# Altium PCB microInv_batt_controller.PcbDoc (part 1 of 2)
Units mil, origin at the board's own origin, x right, y up, seen from the top; angles counter-clockwise.
Board outline 2340 x 3820 mil, 2 copper layers (Top Layer, Bottom Layer), stack 61.8 mil thick; 150 components, 87 nets, 428 pads, 125 vias.
Unrouted connection lines stored in the file: 3.
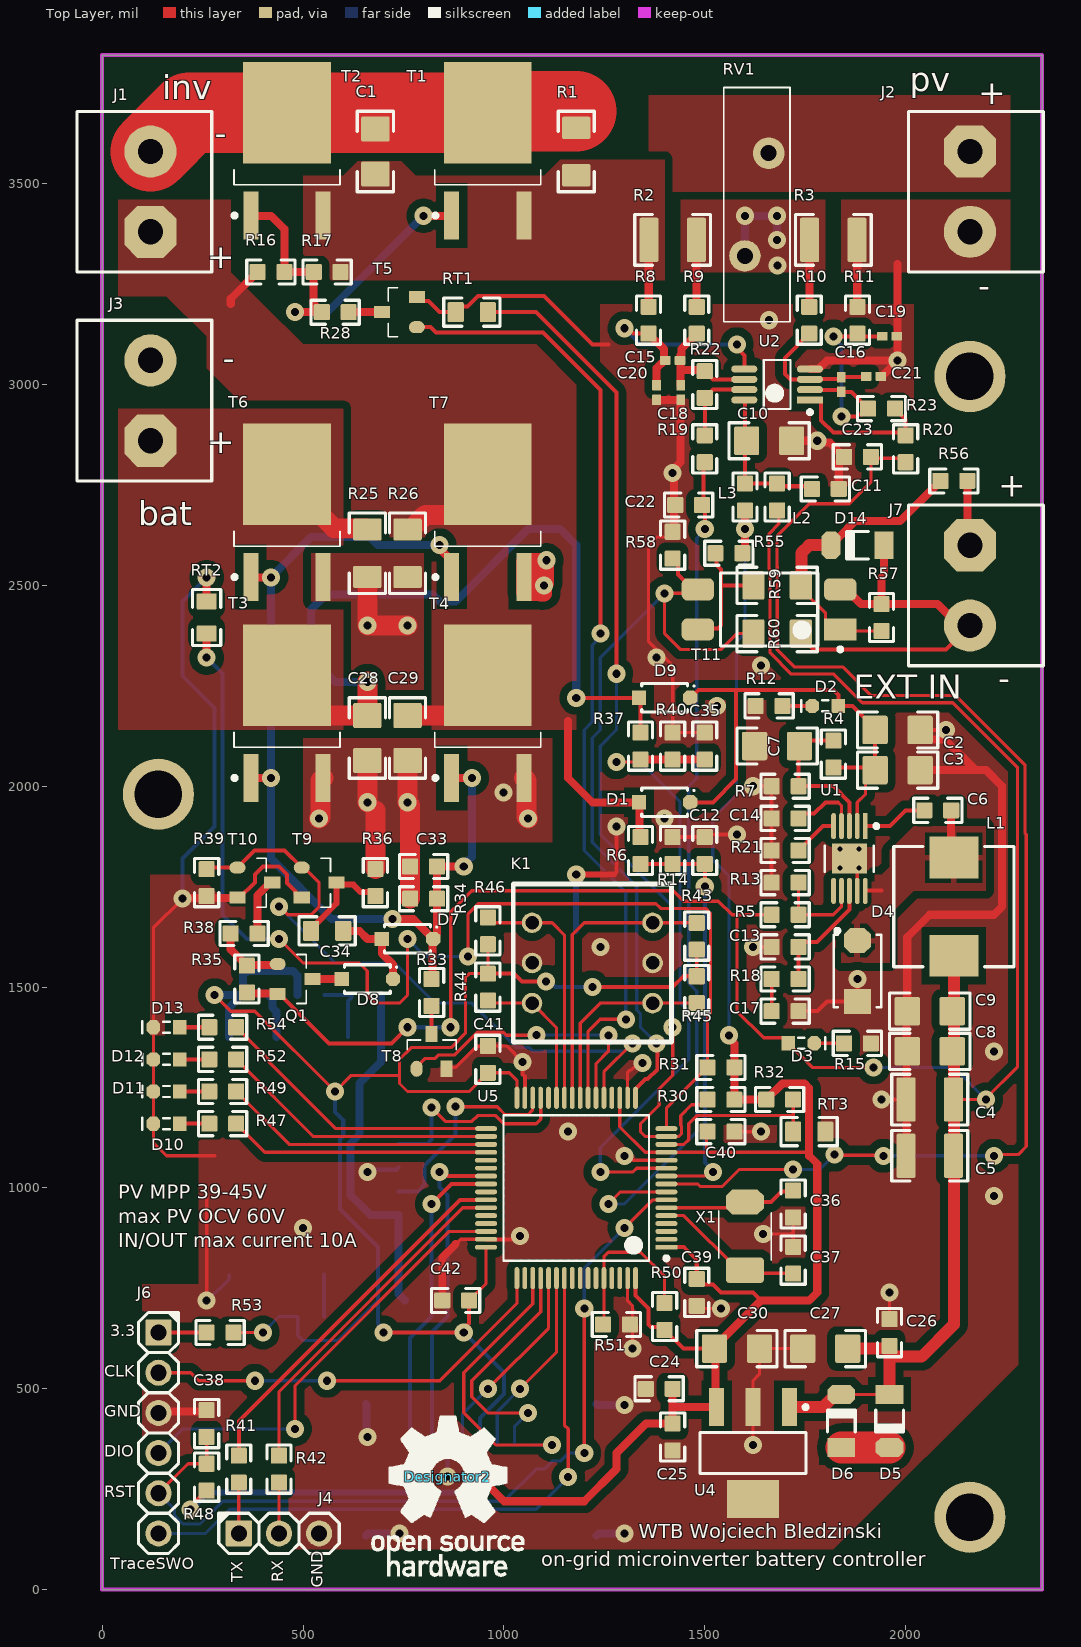
[diagram p0: Top Layer view]
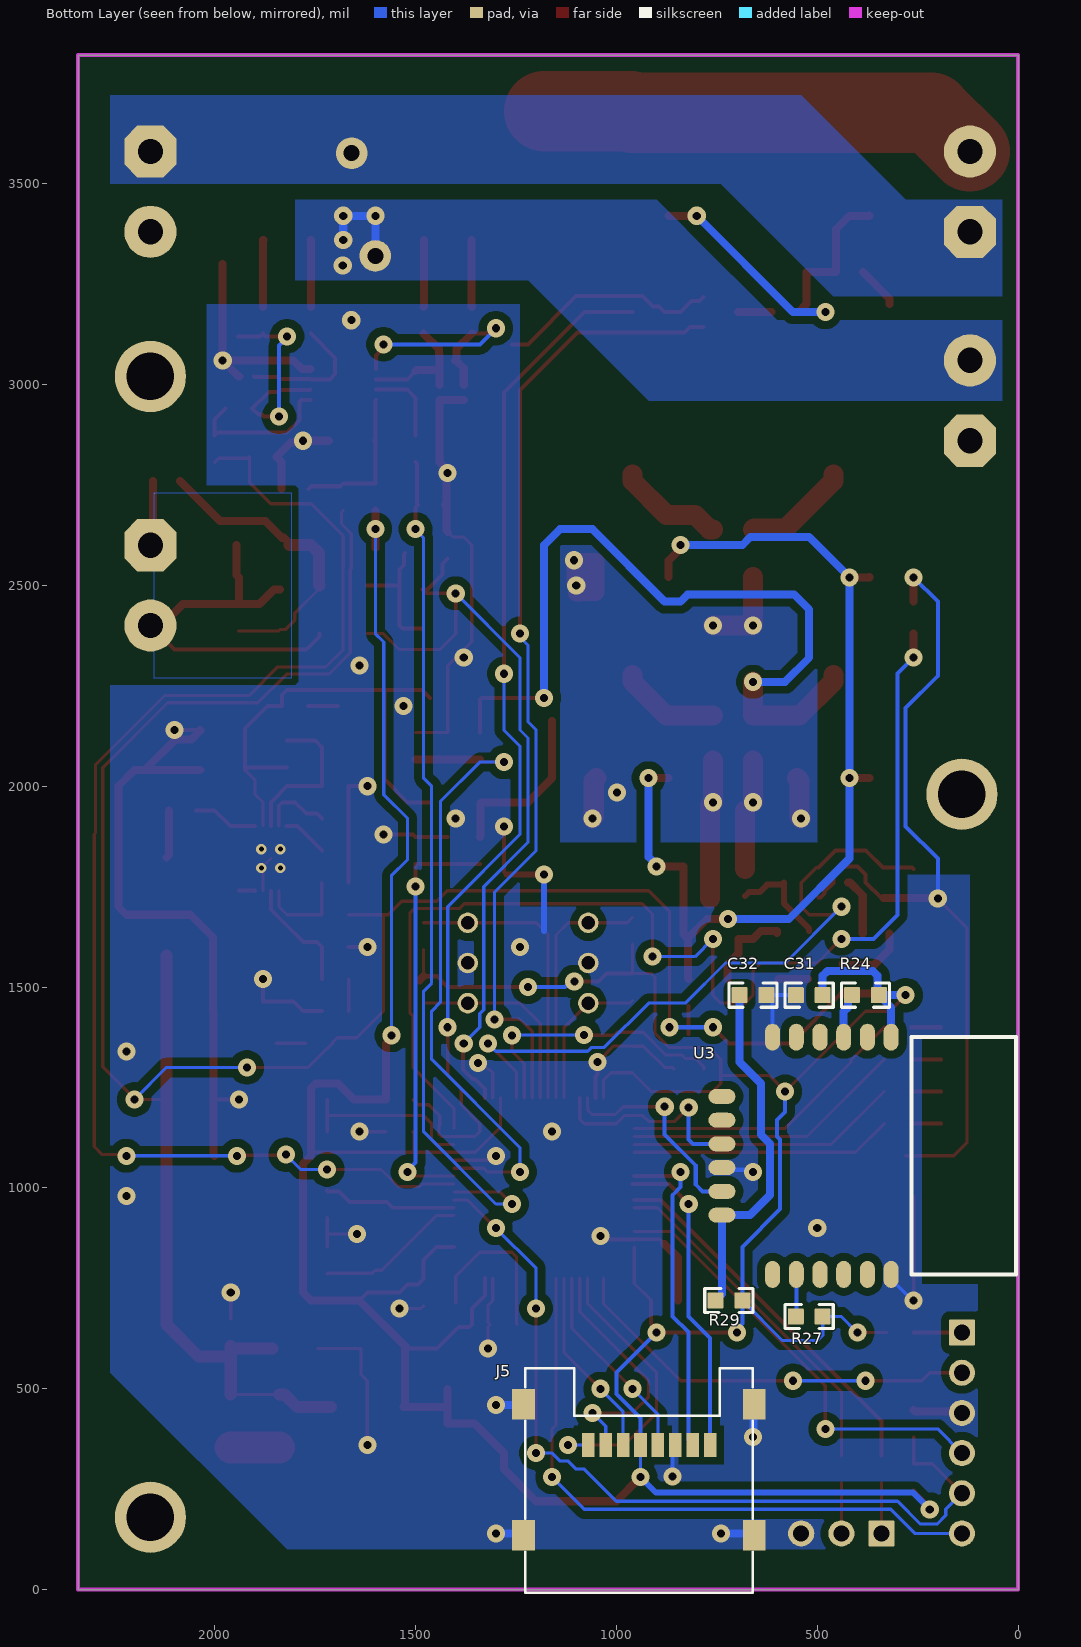
[diagram p1: Bottom Layer view, seen from below]
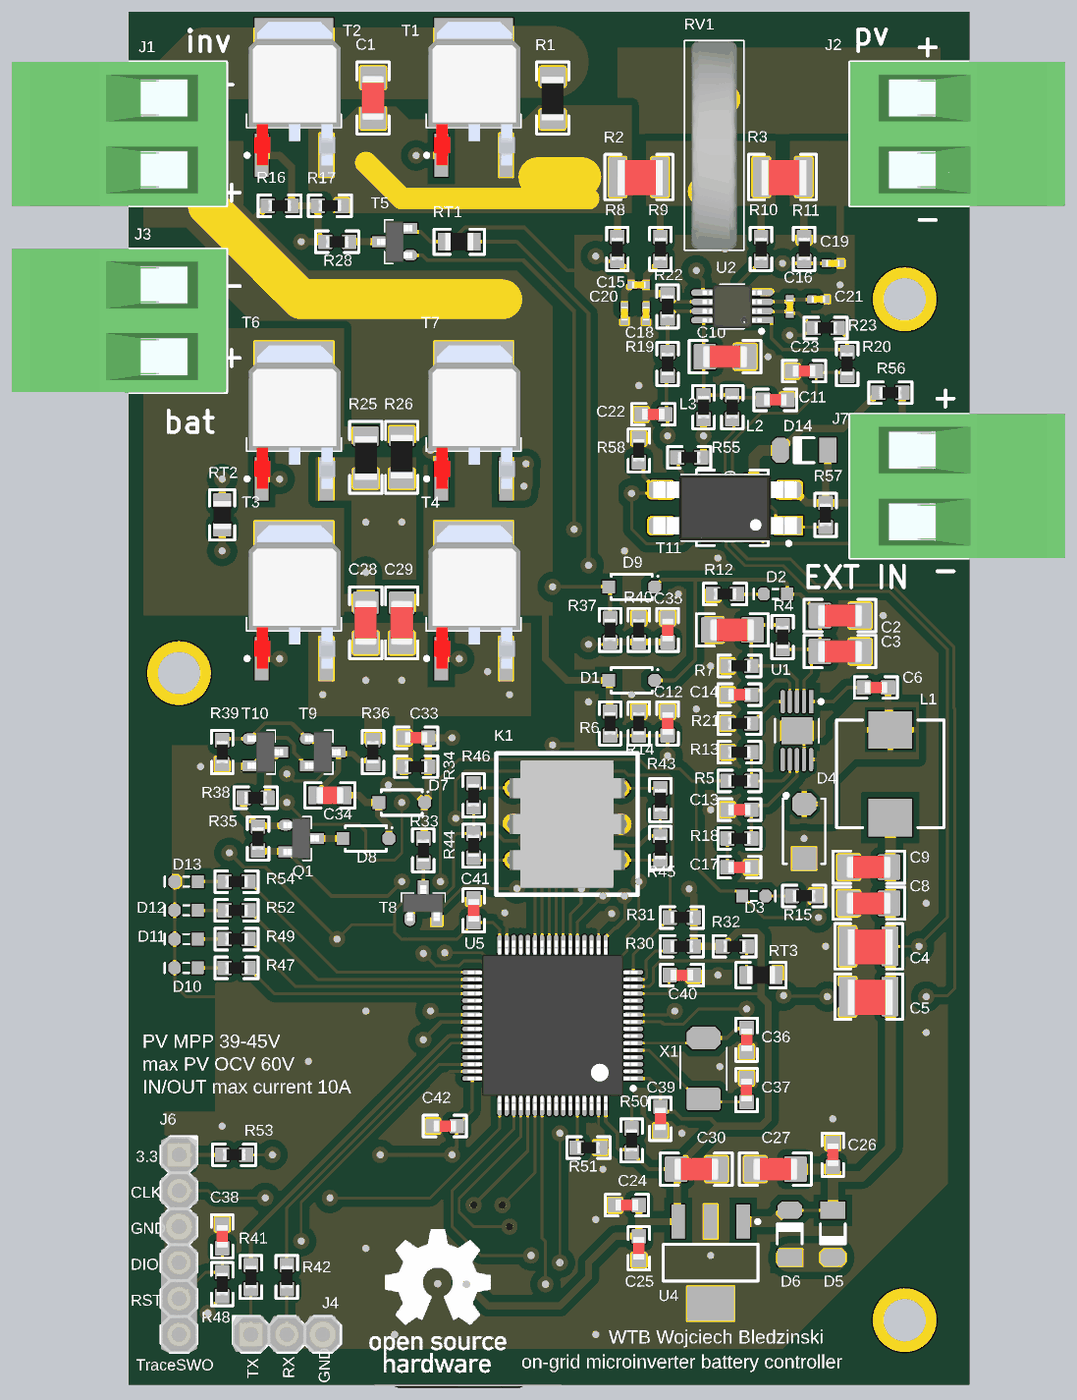
[diagram p3: 3D render of the assembled board from above, using the file's embedded part models]
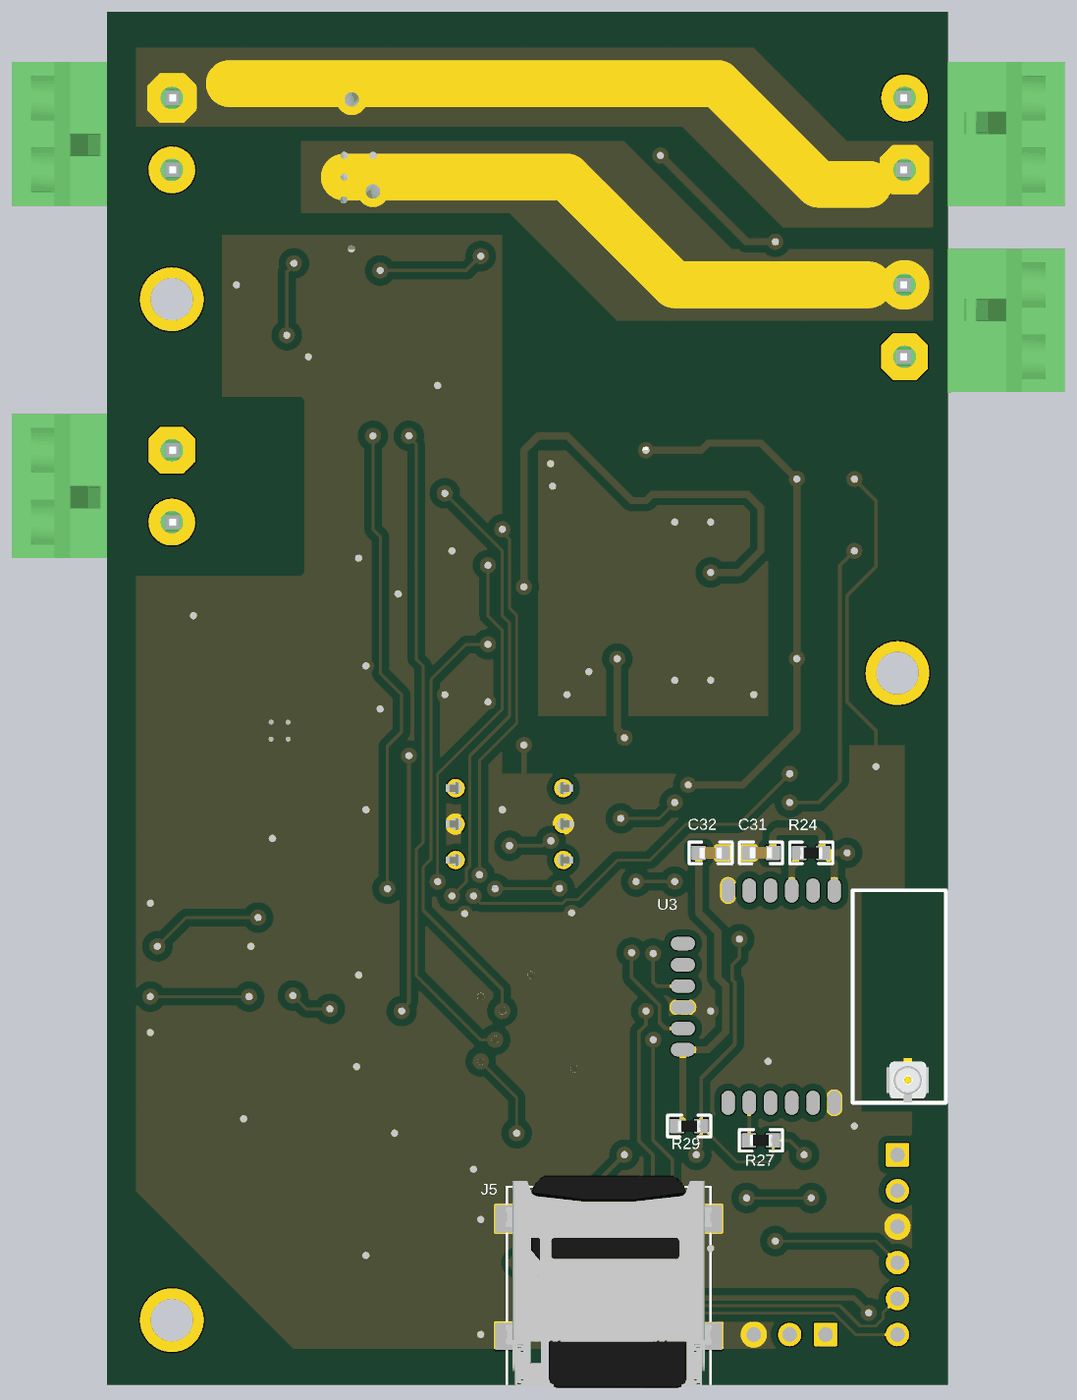
[diagram p4: 3D render of the assembled board from below, using the file's embedded part models]

## Layer stack, top to bottom
Top Solder: solder mask 0.4, Solder Resist, Dk 3.5
Top Layer: signal copper 1.4
Dielectric 1: core 59, Core-043, Dk 4.3
Bottom Layer: signal copper 1.4
Bottom Solder: solder mask 0.4, Solder Resist, Dk 3.5

## Board outline
0,0 0,3820 2340,3820 2340,0

## Design rules (kind name [scope] priority, off if disabled: settings)
Clearance Clearance_400V [InNet('400VDC')] p1: gap=50 ignorepadtopadclearanceinfootprint=FALSE except(0: Arc-Hole Track-Hole SMDPad-Hole THPad-Hole Via-Hole Fill-Hole Poly-Hole Region-Hole Text-Hole)
Clearance [InComponent('U5') or InComponent('U2') or InComponent('U3') or InComponent('U4') or InComponent('u1')] p2: gap=20 ignorepadtopadclearanceinfootprint=FALSE except(0: Arc-Hole Track-Hole SMDPad-Hole THPad-Hole Via-Hole Fill-Hole Poly-Hole Region-Hole Text-Hole; 6: Arc-Arc Arc-Track Arc-SMDPad Track-Track Track-SMDPad SMDPad-SMDPad; 10: Arc-THPad Arc-Via Arc-Text Track-THPad Track-Via Track-Text SMDPad-THPad SMDPad-Via SMDPad-Text THPad-THPad THPad-Via THPad-Text Via-Via Via-Text Text-Text; 15: Fill-Text Poly-Text Region-Text)
Clearance Clearance_1 [All] p3: gap=20 ignorepadtopadclearanceinfootprint=FALSE except(0: Arc-Hole Track-Hole SMDPad-Hole THPad-Hole Via-Hole Fill-Hole Poly-Hole Region-Hole Text-Hole; 10: Arc-Arc Arc-Track Arc-SMDPad Arc-THPad Arc-Via Arc-Text Track-Track Track-SMDPad Track-THPad Track-Via Track-Text SMDPad-SMDPad SMDPad-THPad SMDPad-Via SMDPad-Text THPad-THPad THPad-Via THPad-Text Via-Via Via-Text Text-Text; 15: Fill-Text Poly-Text Region-Text)
FanoutControl Fanout_LCC [IsLCC] p2 off: bgadir=Out bgaviamode=Centered fanoutstyle=Auto fanoutdirection=Alternating viagrid=1 // Fanout_LCC (Default Rule)
PlaneConnect PlaneConnect_1 [InComponentClass('Power') or InNetClass('Power') or IsVia] p1: planeconnectstyle=Direct reliefexpansion=20 reliefentries=4 reliefconductorwidth=10 reliefairgap=10
PlaneConnect [All] p2: planeconnectstyle=Relief reliefexpansion=20 reliefentries=4 reliefconductorwidth=15 reliefairgap=10
PolygonConnect PolygonConnect_1 [All vs InComponentClass('Power') or InNetClass('Power') or IsVia] p1: connectstyle=Direct reliefconductorwidth=10 reliefentries=4 polygonreliefangle="90 Angle" airgapwidth=10
PolygonConnect [All] p2: connectstyle=Relief reliefconductorwidth=15 reliefentries=4 polygonreliefangle="90 Angle" airgapwidth=10
RoutingCorners [All] p1 off: cornerstyle=45-Degree minsetback=100 maxsetback=100
RoutingVias [All] p1: holewidth=20 width=45 viastyle="Through Hole" minholewidth=20 minwidth=45 maxholewidth=20 maxwidth=45
SolderMaskExpansion [All] p1: expansion=4 istentingtop=FALSE
Width [All] p1: maxlimit=200 minlimit=8 preferedwidth=15 minimp=50.000000 maximp=50.000000 favimp=50.000000
27 further rules are at their usual default settings.

## Classes and differential pairs
net class POWER: GND NetC1_1 NetC1_2 NetC28_1 NetC29_2 NetJ3_2 V_SOURCE

## Components (designator, comment, footprint, x,y, rotation, side; value= is the part's Value field where it differs from the comment)
C1 "1u/100" CAP_1206 680,3580 r270 top
C2 "1u/100" CAP_1206 1980,2140 r180 top
C3 "1u/100" CAP_1206 1980,2040 r180 top
C4 "4.7u/25" CAP_1210 2060,1220 r0 top
C5 "4.7u/25" CAP_1210 2060,1080 r0 top
C6 "100n/25" CAP_0603 2080,1940 r0 top
C7 "10u/25" CAP_1206 1680,2100 r180 top
C8 "10u/16" CAP_1206 2060,1340 r180 top
C9 "10u/16" CAP_1206 2060,1440 r180 top
C10 "10u/16" CAP_1206 1660,2860 r0 top
C11 "100n/50" CAP_0603 1800,2740 r180 top
C12 "100n/50" CAP_0603 1500,1840 r90 top
C13 "39p/100" CAP_0603 1700,1600 r180 top
C14 "10n/100" CAP_0603 1700,1920 r180 top
C15 "1n/16" CAP_0402_HD_IPC 1420,3060 r180 top
C16 "1n/16" CAP_0402_HD_IPC 1840,3000 r90 top
C17 "47n/25" CAP_0603 1700,1440 r0 top
C18 "1n/16" CAP_0402_HD_IPC 1440,2980 r270 top
C19 "1n/16" CAP_0402_HD_IPC 1960,3120 r0 top
C20 "1n/16" CAP_0402_HD_IPC 1380,2980 r270 top
C21 "1n/16" CAP_0402_HD_IPC 1920,3020 r0 top
C22 "100n/50" CAP_0603 1460,2700 r180 top
C23 "100n/50" CAP_0603 1880,2820 r180 top
C24 "1u/16" CAP_0603 1386.54,500 r180 top
C25 "1u/16" CAP_0603 1420,380 r270 top
C26 "100n/50" CAP_0603 1960,640 r90 top
C27 "10u/16" CAP_1206 1800,600 r180 top
C28 "1u/100" CAP_1206 660,2120 r270 top
C29 "1u/100" CAP_1206 760,2120 r90 top
C30 "10u/16" CAP_1206 1580,600 r0 top
C31 "1u/16" CAP_0603 520,1480 r0 bottom
C32 "100n/50" CAP_0603 660,1480 r180 bottom
C33 "10n/100" CAP_0603 800,1800 r180 top
C34 "100n/100" CAP_0805 560,1640 r180 top
C35 "100n/50" CAP_0603 1500,2100 r90 top
C36 "220p/100" CAP_0603 1720,960 r90 top
C37 "220p/100" CAP_0603 1720,820 r270 top
C38 "100n/50" CAP_0603 260,413.46 r90 top
C39 "100n/50" CAP_0603 1480,740 r270 top
C40 "100n/50" CAP_0603 1540,1140 r0 top
C41 "100n/50" CAP_0603 960,1320 r90 top
C42 "100n/50" CAP_0603 880,720 r180 top
D1 "Shottky 0.25A/100V BAT46GW" SOD_123 1400,1960 r0 top
D2 "Green LED KP-1608SGC" LED_0603_GREEN 1800,2200 r180 top
D3 "Green LED KP-1608SGC" LED_0603_GREEN 1740,1360 r0 top
D4 "Shottky 2A/20V" SMA_DO-214AC 1880,1540 r90 top
D5 "DNP" D_MINIMELF 1960,420 r270 top
D6 "DNP" D_MINIMELF 1840,420 r90 top
D7 "Shottky 0.25A/100V BAT46GW" SOD_123 760,1620 r0 top
D8 "Shottky 0.25A/100V BAT46GW" SOD_123 660,1520 r0 top
D9 "DNP" SOD_123 1400,2220 r0 top value="Shottky 0.25A/100V BAT46GW"
D10 "Green LED KP-1608SGC" LED_0603_GREEN 160,1160 r180 top
D11 "Green LED KP-1608SGC" LED_0603_GREEN 160,1240 r180 top
D12 "Green LED KP-1608SGC" LED_0603_GREEN 160,1320 r180 top
D13 "Green LED KP-1608SGC" LED_0603_GREEN 160,1400 r180 top
D14 "DNP" D_MINIMELF 1880,2600 r180 top
Designator2 "Comment" PCB_LOGO_OSHW 860,281.5 r0 top
J1 "5.08 TB V" CON_1x2_5.08TB 120,3480 r90 top
J2 "5.08 TB V" CON_1x2_5.08TB 2160,3480 r270 top
J3 "5.08 TB V" CON_1x2_5.08TB 120,2960 r90 top
J4 "1x3p 2.54mm GP" CON_PIN1x3_THT 340,140 r0 top
J5 "Micro SD 112C-TBAR-R02 lub 472192001" 112C_TXAR_R01 943.94,-8.11 r180 bottom
J6 "1x6p 2.54mm" CON_PIN1x6_THT 140,640 r270 top
J7 "5.08 TB V" CON_1x2_5.08TB 2160,2500 r270 top
K1 "HEX/BCD" MECH_SW_HEXBCD 1220,1560 r270 top
L1 "22u 1.09A DLCSS075F-220M" IND_DER0705 2120,1700 r270 top
L2 "DNP" RES_0603 1680,2720 r90 top value="300ohm@100MHz 1A"
L3 "300ohm@100MHz 1A" RES_0603 1600,2720 r90 top
Q1 "BSS84PH6433" SOT23-3 480,1520 r0 top
R1 "dnp" RES_1206 1180,3580 r270 top value="0R 5%"
R2 "2mR 1%" RES_1210 1420,3360 r0 top
R3 "2mR 1%" RES_1210 1820,3360 r0 top
R4 "240k" RES_0603 1820,2080 r270 top
R5 "72k 5%" RES_0603 1700,1680 r180 top
R6 "470k" RES_0603 1340,1840 r90 top
R7 "10k" RES_0603 1700,2000 r0 top
R8 "1k 5%" RES_0603 1360,3160 r90 top
R9 "1k 5%" RES_0603 1480,3160 r90 top
R10 "1k 5%" RES_0603 1760,3160 r90 top
R11 "1k 5%" RES_0603 1880,3160 r90 top
R12 "510 5%" RES_0603 1660,2200 r0 top
R13 "10k 5%" RES_0603 1700,1760 r0 top
R14 "16k 5%" RES_0603 1420,1840 r270 top
R15 "510 5%" RES_0603 1880,1360 r180 top
R16 "100k 5%" RES_0603 420,3280 r0 top
R17 "47k 5%" RES_0603 560,3280 r0 top
R18 "20k 5%" RES_0603 1700,1520 r0 top
R19 "22k 5%" RES_0603 1500,2840 r270 top
R20 "22k 5%" RES_0603 2000,2840 r270 top
R21 "100k 5%" RES_0603 1700,1840 r0 top
R22 "49.9k" RES_0603 1500,3000 r90 top
R23 "49.9k" RES_0603 1940,2940 r180 top
R24 "10k 5%" RES_0603 380,1480 r180 bottom
R25 "4M7 5%" RES_1206 660,2580 r270 top
R26 "4M7 5%" RES_1206 760,2580 r90 top
R27 "10k 5%" RES_0603 520,680 r0 bottom
R28 "330 5%" RES_0603 580,3180 r0 top
R29 "10k 5%" RES_0603 720,720 r0 bottom
R30 "10k 5%" RES_0603 1540,1220 r180 top
R31 "10k 5%" RES_0603 1540,1300 r180 top
R32 "10k 5%" RES_0603 1686.54,1220 r0 top
R33 "10k 5%" RES_0603 820,1486.54 r270 top
R34 "220k" RES_0603 800,1720 r0 top
R35 "10k 5%" RES_0603 360,1520 r90 top
R36 "4k7" RES_0603 680,1760 r270 top
R37 "470k" RES_0603 1340,2100 r90 top
R38 "1k 5%" RES_0603 353.27,1633.27 r180 top
R39 "10k 5%" RES_0603 260,1760 r90 top
R40 "16k 5%" RES_0603 1420,2100 r270 top
R41 "1k 5%" RES_0603 340,300 r90 top
R42 "1k 5%" RES_0603 440,300 r90 top
R43 "10k" RES_0603 1480,1626.54 r90 top
R44 "10k" RES_0603 960,1500 r270 top
R45 "10k" RES_0603 1480,1493.46 r270 top
R46 "10k" RES_0603 960,1640 r90 top
R47 "1k 5%" RES_0603 300,1160 r0 top
R48 "10k 5%" RES_0603 260,280 r90 top
R49 "1k 5%" RES_0603 300,1240 r0 top
R50 "dnp" RES_0603 1400,680 r90 top value="10k 5%"
R51 "10k 5%" RES_0603 1280,660 r180 top
R52 "1k 5%" RES_0603 300,1320 r0 top
R53 "510 5%" RES_0603 293.46,640 r0 top
R54 "1k 5%" RES_0603 300,1400 r0 top
R55 "10k 5%" RES_0603 1560,2580 r180 top
R56 "10k" RES_0603 2120,2760 r180 top
R57 "10k" RES_0603 1940,2420 r90 top
R58 "10k 5%" RES_0603 1420,2600 r90 top
R59 "DNP" RES_1206 1680,2500 r0 top value="0R 5%"
R60 "DNP" RES_1206 1680,2380 r0 top value="0R 5%"
RT1 "10k B=3900K NCP21XV103J03RA" RES_0805 920,3180 r180 top value="10k B=3900K NCP21XV103J03RA"
RT2 "10k B=3900K NCP21XV103J03RA" RES_0805 260,2420 r90 top value="10k B=3900K NCP21XV103J03RA"
RT3 "10k B=3900K NCP21XV103J03RA" RES_0805 1760,1140 r0 top value="10k B=3900K NCP21XV103J03RA"
RV1 "50VAC 1kA" RES_VAR_S14 1629.53,3447.95 r90 top
T1 "IPD034N06N3GATMA1" DPAK_369C_issueD 960,3580 r90 top
T2 "IPD034N06N3GATMA1" DPAK_369C_issueD 460,3580 r90 top
T3 "IPD034N06N3GATMA1" DPAK_369C_issueD 460,2180 r90 top
T4 "IPD034N06N3GATMA1" DPAK_369C_issueD 960,2180 r90 top
T5 "N mosfet BSS138" SOT23-3 740,3180 r180 top
T6 "IPD034N06N3GATMA1" DPAK_369C_issueD 460,2680 r90 top
T7 "IPD034N06N3GATMA1" DPAK_369C_issueD 960,2680 r90 top
T8 "N mosfet BSS138" SOT23-3 820,1340 r90 top
T9 "N mosfet BSS138" SOT23-3 540,1760 r0 top
T10 "N mosfet BSS138" SOT23-3 380,1760 r0 top
T11 "HCPL817-300E" HCPL-817 1660,2440 r180 top
U1 "TPS57160QDGQRQ1" MSOP10_DQG_S_PDSO_G10 1860,1820 r270 top
U2 "LMV772QMM/NOPB" MSOP8_3x3_846AD-01 1680,3000 r180 top
U3 "WT8266-S2" MOD_WT8266-S2 371.14,1080 r270 bottom
U4 "MCP1825S-3302ED" sot223 1620,340 r270 top
U5 "IC_STM32L431RCT6_LQFP64" LQFP64_10x10 1180,1000 r180 top
X1 "OSCX_8M_5,0x3,2" X_5.0X3.2 1600,880 r270 top

## Footprints (in the part's own frame and the unit in brackets; to place one, negate y for a bottom-side part, rotate by r counter-clockwise, add the part's x,y. Pads: shape width x height; smd on the part's side, far side on the other; paste and mask are expansions set on the pad)
112C_TXAR_R01 [mm] "Micor SD Connector, 3D MOLEX 472192001; ATTEND 112C-TBAR-R02"
  rect 0.8x1.5 smd: 1(-3.2,9.35) 2(-2.1,9.35) 3(-1,9.35) 4(0.1,9.35) 5(1.2,9.35) 6(2.3,9.35) 7(3.4,9.35) 8(4.5,9.35)
  rect 1.448x1.93 smd: 6(-7.29,3.632) 6(-7.29,11.938) 6(7.29,3.632) 6(7.29,11.938)
  silkscreen extent -7.2,0 7.2,14.2, body extent -7.3,0 7.3,15, height 2.1
CAP_0402_HD_IPC [mm]
  rrect10% 0.67x0.55 smd: 1(-0.465,0) 2(0.465,0)
  body extent -0.5,-0.25 0.5,0.25, height 0.56
CAP_0603 [mil]
  rrect15% 40x40 smd: 1(-33.46,0) 2(33.46,0)
  silkscreen extent -60,-30 60,30, body extent -31,-16 31,15, height 12
CAP_0805 [mil]
  rrect15% 40x50 smd: 1(-40,0) 2(40,0)
  silkscreen extent -70,-35 70,35, body extent -39,-25 39,25, height 31
CAP_1206 [mil] "1206 (3216 metric)"
  rrect15% 63x71 smd: 1(-56,0) 2(56,0)
  silkscreen extent -100,-45 100,45, body extent -63,-31 63,31, height 39
CAP_1210 [mm] "1210"
  rrect15% 1.2x2.8 smd: 1(-1.5,0) 2(1.5,0)
  silkscreen extent -2.4,-1.6 2.4,1.6, body extent -1.5,-1.3 1.7,1.2, height 0.92
CON_1x2_5.08TB [mm] "5,08mm - PCB Headers - vertical - Opened ends - 02p, 3D WE 691311500002, MLX , NINIGI TBG-5-PB-2P/GN, plug 691351500002 (rev1)"
  oct 3.3x3.3 hole 1.6: 1(-2.54,0)
  round 3.3 hole 1.6: 2(2.54,0)
  silkscreen extent -5.08,-3.87 5.08,4.64, body extent -5.08,-3.86 5.08,11.3, height 22.05
CON_PIN1x3_THT [mil]
  rrect10% 65x65 hole 40: 1(0,0)
  round 65 hole 40: 2(100,0) 3(200,0)
  silkscreen extent -50,-50 250,50, body extent -52,-49 248,51, height 371
CON_PIN1x6_THT [mil]
  rrect10% 65x65 hole 40: 1(0,0)
  round 65 hole 40: 2(100,0) 3(200,0) 4(300,0) 5(400,0) 6(500,0)
  silkscreen extent -50,-50 550,50, body extent -50,-50 550,50, height 371
D_MINIMELF [mm] "SOD-80"
  rect 1.2x1.75 smd: 1(-1.675,0)
  oct 1.2x1.75 smd: 2(1.675,0)
  silkscreen extent -0.7,-0.87 0.7,0.88, body extent -1.85,-0.8 1.85,0.8, height 1.6
DPAK_369C_issueD [mm] "D-PAK 369C_issueD, TO252AA, Body 6,2x6,7mm (max), IPC MD"
  rect 3.05x0.95 smd: 1(-4.05,2.29) 3(-4.05,-2.29)
  rect 6.4x5.55 smd: 4(2.45,0)
  silkscreen extent -4.17,-3.35 -1.15,3.44, body extent -4.77,-3.3 5.37,3.2, height 2.43
HCPL-817 [mm] "SOP, 4-Leads, Body 4.60x6.50mm, Pitch 2.54mm, IPC Medium Density"
  rect 2.05x1.4 smd paste-0.127: 1(-4.5,1.27)
  rrect50% 2.05x1.4 smd paste-0.127: 2(-4.5,-1.27) 3(4.5,-1.27) 4(4.5,1.27)
  silkscreen extent -4.63,-2.3 3.07,2.64, body extent -5.08,-2.3 5.08,2.3, height 3.5
IND_DER0705 [mm] "DER0705 Ferrocore; Precision Wire Wound Inductor, 2-Leads, Body 7,6x7,6mm, IPC Medium Density"
  rect 2.65x3.1 smd: 1(-3.1,0) 2(3.1,0)
  silkscreen extent -3.8,-3.8 3.8,3.8, body extent -3.8,-3.8 3.8,3.8, height 4.9
LED_0603_GREEN [mm] "LED 0603 GREEN"
  rect 0.85x0.9 smd: 1(-0.825,0)
  oct 0.85x0.9 smd: 2(0.825,0)
  silkscreen extent -0.2,-0.38 1.53,0.37, body extent -0.85,-0.45 0.85,0.45, height 1.1
LQFP64_10x10 [mm] "TSQFP, 64-Leads, Body 10.00x10.00mm, Pitch 0.50mm, IPC MD,  LQFP64 - 64-pin, 10 x 10 mm low-profile quad flat package outline"
  rect 1.4x0.3 smd: 1(-5.7,3.75)
  oval 1.4x0.3 smd: 2(-5.7,3.25) 3(-5.7,2.75) 4(-5.7,2.25) 5(-5.7,1.75) 6(-5.7,1.25) 7(-5.7,0.75) 8(-5.7,0.25) 9(-5.7,-0.25) 10(-5.7,-0.75) 11(-5.7,-1.25) 12(-5.7,-1.75) 13(-5.7,-2.25) 14(-5.7,-2.75) 15(-5.7,-3.25) 16(-5.7,-3.75) 33(5.7,-3.75) 34(5.7,-3.25) 35(5.7,-2.75) 36(5.7,-2.25) 37(5.7,-1.75) 38(5.7,-1.25) 39(5.7,-0.75) 40(5.7,-0.25) 41(5.7,0.25) 42(5.7,0.75) 43(5.7,1.25) 44(5.7,1.75) 45(5.7,2.25) 46(5.7,2.75) 47(5.7,3.25) 48(5.7,3.75)
  oval 0.3x1.4 smd: 17(-3.75,-5.7) 18(-3.25,-5.7) 19(-2.75,-5.7) 20(-2.25,-5.7) 21(-1.75,-5.7) 22(-1.25,-5.7) 23(-0.75,-5.7) 24(-0.25,-5.7) 25(0.25,-5.7) 26(0.75,-5.7) 27(1.25,-5.7) 28(1.75,-5.7) 29(2.25,-5.7) 30(2.75,-5.7) 31(3.25,-5.7) 32(3.75,-5.7) 49(3.75,5.7) 50(3.25,5.7) 51(2.75,5.7) 52(2.25,5.7) 53(1.75,5.7) 54(1.25,5.7) 55(0.75,5.7) 56(0.25,5.7) 57(-0.25,5.7) 58(-0.75,5.7) 59(-1.25,5.7) 60(-1.75,5.7) 61(-2.25,5.7) 62(-2.75,5.7) 63(-3.25,5.7) 64(-3.75,5.7)
  silkscreen extent -5.82,-4.6 4.6,4.6, body extent -6,-6 6,6, height 1.6
MECH_SW_HEXBCD [mm] "ERD116RSZ, 3D z omron A6CV-16R"
  round 1.3 hole 0.85: 1(-2.54,3.81) 2(2.54,-3.81) 4(2.54,3.81) 8(-2.54,-3.81) C(0,3.81) C(0,-3.81)
  silkscreen extent -5,-5 5,5, body extent -4.5,-4.5 4.5,4.51, height 4.5
MOD_WT8266-S2 [mm] "WT8266-S2 TENSILICA XIAOE WIFI"
  oval 1.7x0.95 smd: 1(-7.5,1.4) 2(-7.5,-0.1) 3(-7.5,-1.6) 4(-7.5,-3.1) 5(-7.5,-4.6) 6(-7.5,-6.1) 13(7.5,-6.1) 14(7.5,-4.6) 15(7.5,-3.1) 16(7.5,-1.6) 17(7.5,-0.1) 18(7.5,1.4)
  oval 0.95x1.7 smd: 7(-3.75,-9.3) 8(-2.25,-9.3) 9(-0.75,-9.3) 10(0.75,-9.3) 11(2.25,-9.3) 12(3.75,-9.3)
  silkscreen extent -7.5,2.7 7.5,9.3, body extent -7.5,-9.3 7.5,9.3, height 3.05
MSOP8_3x3_846AD-01 [mm] "Analog RM-8 JEDEC MO-187-AA; Body 3,1x3,1mm (max), 0,65mm, IPC MD"
  rect 1.65x0.45 smd: 1(-2.075,0.975)
  oval 1.65x0.45 smd: 2(-2.075,0.325) 3(-2.075,-0.325) 4(-2.075,-0.975) 5(2.075,-0.975) 6(2.075,-0.325) 7(2.075,0.325) 8(2.075,0.975)
  silkscreen extent -2.2,-1.55 0.85,1.87, body extent -2.1,-1.53 2.1,1.52, height 1.3
MSOP10_DQG_S_PDSO_G10 [mm] "PowerPAD MSOP10"
  rect 1.65x0.3 smd: 1(-2.05,1)
  oval 1.65x0.3 smd: 2(-2.05,0.5) 3(-2.05,0) 4(-2.05,-0.5) 5(-2.05,-1) 6(2.05,-1) 7(2.05,-0.5) 8(2.05,0) 9(2.05,0.5) 10(2.05,1)
  rect 1.9x2.2 smd: 11(0,0)
  silkscreen extent -2.17,-1.55 0.82,1.83, body extent -1.55,-1.55 1.55,1.55, height 1.1
PCB_LOGO_OSHW [mil] "open source hardware logo 400px"
  silkscreen extent -190,-248 191,151
RES_0603 [mil]
  rrect15% 40x40 smd: 1(-33.46,0) 2(33.46,0)
  silkscreen extent -60,-30 60,30, body extent -31,-16 31,16, height 18
RES_0805 [mil]
  rrect15% 40x50 smd: 1(-40,0) 2(40,0)
  silkscreen extent -70,-35 70,35, body extent -39,-25 39,25, height 20
RES_1206 [mm]
  rrect15% 1.4x1.8 smd: 1(-1.5,0) 2(1.5,0)
  silkscreen extent -2.54,-1.14 2.54,1.14, body extent -1.5,-0.78 1.6,0.78, height 0.55
RES_1210 [mm] "1210"
  rrect15% 1.2x2.8 smd: 1(-1.5,0) 2(1.5,0)
  silkscreen extent -2.4,-1.6 2.4,1.6, body extent -1.5,-1.3 1.7,1.2, height 0.92
RES_VAR_S14 [mm] "warystor epcos S14"
  round 2 hole 1.016: 1(-3.25,0.75) 2(3.25,-0.75)
  silkscreen extent -7.4,-2.1 7.4,2.1, body extent -7.39,-1.6 7.39,1.6, height 17.4
SMA_DO-214AC [mm] "SMA, JEDEC DO214 v AC"
  rect 1.6x1.7 smd: 1(-1.925,0)
  oct 1.6x1.7 smd: 2(1.925,0)
  silkscreen extent -2.3,-1.5 2.67,1.5, body extent -2.3,-1.47 2.3,1.48, height 2.23
SOD_123 [mm] "SOD-123 CASE 425-04 ISSUE G, 2-Leads, Body 2,7x1,6mm, IPC HD"
  rect 0.9x0.9 smd: 1(-1.625,0)
  oct 0.9x0.9 smd: 2(1.625,0)
  silkscreen extent -1.45,-0.9 1.9,0.9, body extent -1.42,-0.9 1.42,0.9, height 1.35
SOT23-3 [mil] "JEDEC TO-236AB CASE 318 STYLE 6"
  oval 40x30 smd: 1(-43.31,37.4)
  rect 40x30 smd: 2(-43.31,-37.4) 3(43.31,0)
  silkscreen extent 5,-61 28,61, body extent -50,-58 49,57, height 38
sot223 [mm] "TO-261AA SOT223, 4-Leads, Body 6,7x7,3mm (max), Pitch 2,30mm, IPC MD"
  rect 2.4x0.95 smd: 1(-2.9,2.3) 2(-2.9,0) 3(-2.9,-2.3)
  rect 2.4x3.3 smd: 4(2.9,0)
  silkscreen extent -3.02,-3.35 1.3,3.45, body extent -1.85,-3.35 1.85,3.35, height 1.8
X_5.0X3.2 [mm]
  oct 1.6x2.4 smd: 1(-2.159,0)
  rrect25% 1.6x2.4 smd: 2(2.159,0)
  silkscreen extent -1.6,-1.65 1.52,1.65, body extent -2.54,-1.65 2.54,1.65, height 1.3

## Part data
C1 C2 C3 C28 C29: library part CAP_B_1u_100_1206_X7R, "X7R chip capacitor", MANUFACTURER=AVX, Manufacturer Part Number=12061C105KAT2A, Supplier Part Number 1=2112837, Temperature="-55 to + 125 stC", Tolerance=10%, Voltage=100, Category=CAP, Eng.="W.Bledzinski 12.06.2014", Price1k=0.2, Price10=0.22, Supplier=TME, Supplier 1=FARNELL, Supplier Part Number=12061C105KAT2A, Type=SMD
C4 C5: library part CAP_B_4.7u_25_1210_X5R, "X5R chip capacitor", MANUFACTURER=YAGEO, Manufacturer Part Number=CC1210KKX5R8BB475, Supplier Part Number=CC1210KKX5R8475, Supplier Part Number 1=1833828, Temperature="-55 to + 125 stC", Tolerance=10%, Voltage=25, Category=CAP, Eng.="W.Bledzinski 14.05.2014", Price1k=0.007, Price10=0.17, Supplier=TME, Supplier 1=Farnell, Type=SMD
C6 C11 C12 C22 C23 C26 C32 C35 C38 C39 C40 C41 C42: library part CAP_B_100n_50_0603_X7R, "X7R chip capacitor", MANUFACTURER=SAMSUNG, Manufacturer Part Number=CL10B104KB8NNNC, Temperature="-55 to + 125 stC", Tolerance=10%, Voltage=50, Category=CAP, Eng.="W.Bledzinski 23.5.2013", Price1k=0.006, Price10=0.1, Supplier=TME, Supplier Part Number=CL10B104KB8NNNC, Type=SMD
C7: library part CAP_B_10u_25_1206_X5R, "X5R chip capacitor", MANUFACTURER=SAMSUNG, Manufacturer Part Number=CL31A106KAHNNNE, Supplier Part Number 1=2426961, Temperature="-55 to + 85 stC", Tolerance=10%, Voltage=25, Category=CAP, Eng.="W.Bledzinski 23.10.2014", Price1k=0.045, Price10=0.08, Supplier=TME, Supplier 1=Farnell, Supplier Part Number=CL31A106KAHNNNE, Type=SMD
C8 C9 C10 C27 C30: library part CAP_B_10u_16_1206_X7R, "X7R chip capacitor", MANUFACTURER=KYOCERA, Manufacturer Part Number=CM316X7R106K16AT, Supplier Part Number 1=2070502, Temperature="-55 to + 125 stC", Tolerance=10%, Voltage=16, Category=CAP, Eng.="W.Bledzinski 12.06.2014", Price1k=0.045, Price10=0.08, Supplier=TME, Supplier 1=Farnell, Supplier Part Number=CM316X7R106K16AT, Type=SMD
C13: library part CAP_B_39p_100_0603_COG, "COG chip capacitor", Temperature="-55 to + 125 stC", Tolerance=10%, Voltage=100, Category=CAP, Eng.="W.Bledzinski 12.06.2015", Price1k=0.006, Price10=0.1, Supplier=TME, Supplier 1=Farnell, Type=SMD
C14 C33: library part CAP_B_10n_100_0603_X7R, "X7R chip capacitor", MANUFACTURER=SAMSUNG, Manufacturer Part Number=CL10B103KC8NNNC, Supplier Part Number 1=1327671, Temperature="-55 to + 125 stC", Tolerance=10%, Voltage=100, Category=CAP, Eng.="W.Bledzinski 08.05.2014", Price1k=0.0027, Price10=0.01, Supplier=TME, Supplier 1=Farnell, Supplier Part Number=CL10B103KC8NNNC, Type=SMD
C15 C16 C18 C19 C20 C21: library part CAP_B_1n_16_0402_X7R, "X7R chip capacitor", MANUFACTURER=SAMSUNG, Manufacturer Part Number=0402YC102KAT2A, Supplier Part Number 1=1327660, Temperature="-55 to + 125 stC", Tolerance=10%, Voltage=16, Category=CAP, Eng.="W.Bledzinski 12.06.2014", Price1k=0.0027, Price10=0.01, Supplier=TME, Supplier 1=Farnell, Supplier Part Number=0402YC102KAT2A, Type=SMD
C17: library part CAP_B_47n_25_0603_X7R, "X7R chip capacitor", Temperature="-55 to + 125 stC", Tolerance=10%, Voltage=25, Category=CAP, Supplier=TME, Supplier 1=Farnell, Type=SMD
C24 C25 C31: library part CAP_B_1u_16_0603_X7R, "X7R chip capacitor", MANUFACTURER=SAMSUNG, Manufacturer Part Number=CL10B105KO8NNNC, Supplier Part Number 1=2310404, Temperature="-55 to + 125 stC", Tolerance=10%, Voltage=16, Category=CAP, Eng.="W.Bledzinski 23.5.2013", Price1k=0.012, Price10=0.1, Supplier=TME, Supplier 1=Farnell, Supplier Part Number=CL10B105KO8NNNC, Type=SMD
C34: library part CAP_B_100n_100_0805_X7R, "X7R chip capacitor", MANUFACTURER=AVX, Manufacturer Part Number=08051C104KAZ2A, Supplier Part Number 1=1301805, Temperature="-55 to + 85 stC", Tolerance=10%, Voltage=100, Category=CAP, Eng.="W.Bledzinski 12.06.2014", Price1k=0.03, Price10=0.1, Supplier=TME, Supplier 1=FARNELL, Supplier Part Number=08051C104KAZ2A, Type=SMD
C36 C37: library part CAP_B_220p_100_0603_COG, "COG chip capacitor", MANUFACTURER=SAMSUNG, Manufacturer Part Number=CL10C221JB8NNNC, Supplier Part Number 1=2320780, Temperature="-55 to + 125 stC", Tolerance=5%, Voltage=100, Category=CAP, Eng.="W.Bledzinski 14.05.2014", Price1k=0.003, Price10=0.01, Supplier=TME, Supplier 1=Farnell, Supplier Part Number=CL10C221JB8NNNC, Type=SMD
D1 D7 D8 D9: library part D_0.25_100_BAT46GWX, "Shottky Diode trr 4ns 0,43V @ 0.05A 0.75V@0.25A", Current=250mA, MANUFACTURER=Nexperia, Manufacturer Part Number="BAT46GWX 934070363115", Supplier Part Number=BAT46GWX, Supplier Part Number 1=2760404, Temperature="-55 to +150 stC", Voltage=100, Category=DIODE, Price1k=0.04, Price10=0.062, Supplier=TME, Supplier 1=FARNELL, Type=SMD
D2 D3 D10 D11 D12 D13: library part D_LED_0603_GREEN, "Diode LED SMD 2.2V @ 20mA 15mcd", Current=20mA, MANUFACTURER=KINGBRIGHT, Manufacturer Part Number=KP-1608SGC, Supplier Part Number 1=8529833, Temperature="-40 to +85 stC", Voltage=5, Category=LED, Eng.="W.Bledzinski 22.5.2013", Price1k=0.03, Price10=0.05, Supplier=TME, Supplier 1=Farnell, Supplier Part Number=KP-1608SGC, Type=SMD
D4: library part D_2A_20_B220A, "Shottky Diode 0,5V @ 2A SMA 200pF", Current=2, MANUFACTURER=DIODES, Manufacturer Part Number=B220A-13-F, Supplier Part Number=B220-13-F, Supplier Part Number 1=1858604, Temperature="-65 to + 150 stC", Voltage=20, Category=DIODE, Eng.="W.Bledzinski 4.6.2013", Price1k=0.06, Price10=0.15, Supplier=AVNET, Supplier 1=FARNELL, Type=SMD
D5 D6 D14: library part D_LL4148_MMELF, Forward voltage at If=1.1V, Load current=0.15A, MANUFACTURER="ON SEMICONDUCTOR (FAIRCHILD)", Manufacturer Part Number=FDLL4148, Max. forward impulse current=2A, Max. load current=0.5A, Max. off-state voltage=100V, Category=DIODE, Pricing="50=0.0128, 250=0.0113, 1000=0.0092, 5000=0.0078, 20000=0.0074 (USD)", Supplier 1=TME, Supplier Part Number 1=FDLL4148, Type=SMD
J1 J2 J3 J7: library part CON_1x2_TB_5.08V, "THT 5,08mm, WE 691311500002 (rev1), NINIGI , MLX", Current=20A, MANUFACTURER="Wurth Electronics", Manufacturer Part Number=691311500002, Supplier Part Number 1=TBG-5-PB-2P/GN, Pitch="0.200\" (5.08mm)", Supplier 1=TME, Supplier 2=Digi-Key, Supplier Part Number 2=732-2052-ND, Supplier Unit Price 1=$0.33
J4: library part CON_1x3_GP_THT, "THT 2,54 goldpin", Current=3A, MANUFACTURER=TME, Manufacturer2=MOLEX, Manufacturer2 Part Number=MX-90120-0123, Manufacturer Part Number=ZL201-03G, Supplier Part Number 1=WM8073-ND, Temperature="-55 to +125 stC", Category=CONN, Eng.="W.Bledzinski 14.11.2013", Price1k=0.1, Price10=0.15, Supplier=TME, Supplier 1=digi-key, Supplier Part Number=ZL201-03G, Type=THT
J5: library part CON_MicroSD, "Micro SD connector SMD, ATTEND 112C-TBAR-R02; MOLEX 472192001", MANUFACTURER=ATTEND, Manufacturer Part Number=112C-TBAR-R02, Supplier Part Number=MCC-SDMICRO/1, Temperature="-25 to +85 stC", Category=CONN, Eng.="W.Bledzinski 17.5.2013", Price1k=0.65, Price10=0.8, Supplier=TME, Supplier 1=TME, Supplier Part Number 1=MCC-SDMICRO/1, Type=SMD
J6: library part CON_1x6_GP_THT, "THT 2,54 goldpin", Current=3A, MANUFACTURER=CONNFLY, Manufacturer2=TME, Manufacturer2 Part Number=ZL201-06G, Manufacturer Part Number=DS1021-1*6SF1-1, Temperature="-55 to +125 stC", Category=CONN, Eng.="W.Bledzinski 02.09.2013", Price1k=0.1, Price10=0.15, Supplier=TME, Supplier 1=TME, Supplier Part Number=ZL201-06G, Supplier Part Number 1=ZL201-06G, Type=THT
K1: library part MECH_SW_HEXBCD, "Zadajnik kodu", Current=100mA, MANUFACTURER=ECE, Manufacturer Part Number=ERD116RSZ, Temperature="-40 to + 85 stC", Voltage=200V, Category=SWITCH, Eng.="W.Bledzinski 22.04.2014", Price1k=1.8, Price10=2.7, Supplier=TME, Supplier 1=TME, Supplier Part Number=ERD116RSZ, Supplier Part Number 1=ERD116RSZ, Type=THT
L1: library part IND_22u_1.09A_DER0705-22, "shielded power inductor 1.09A Rdc=0,12", Current=1.09, MANUFACTURER=FERROCORE, Manufacturer Part Number=DER0705-22, Supplier Part Number=DLCSS075F-220M, Temperature="-40 to + 85 stC", Tolerance=20%, Category=IND, Eng.="W.Bledzinski 16.06.2014", Price1k=0.4, Price10=0.45, Supplier=MARITEX, Supplier 1=TME, Supplier Part Number 1=DER0705-22, Type=SMD
L2 L3: library part IND_FB_300R_0603, "2A Rdc=0,15 SRF 250MHz", Current=2, MANUFACTURER=WE, Manufacturer Part Number=742792641, Supplier Part Number=1635705RL, Supplier Part Number 1=1635705, Temperature="-40 to + 125 stC", Tolerance=25%, Category=IND, Eng.="W.Bledzinski 22.5.2013", Price1k=.08, Price10=.21, Supplier=FARNELL, Supplier 1=FARNELL, Type=SMD
Q1: library part T_BSS84, "50V 130mA P Mosfet", Drain current=-140mA, Drain-source voltage=-60V, Drive Voltage (Max Rds On,  Min Rds On)="4.5V, 10V", Gate-source voltage=±20V, Input Capacitance (Ciss) (Max) @ Vds="19pF @ 25V", MANUFACTURER="INFINEON TECHNOLOGIES", On-state resistance="8-12Ω @ 4.5V, 5-8Ω @ 10V", Operating Temperature="-55°C ~ 150°C (TJ)", Pd - Power Dissipation="300 mW", Power=360mW, Gate Charge (Qg) (Max) @ Vgs="1.5nC @ 10V", Manufacturer Part Number=BSS84PH6433, Pricing="25=0.0345, 100=0.031, 500=0.0274, 2500=0.0246, 10000=0.023 (USD)", Rds On (Max) @ Id, Vgs="8 Ohm @ 170mA, 10V", Supplier 1=TME, Supplier Part Number 1=BSS84PH6433, Vgs(th) (Max) @ Id="2V @ 20µA"
R1 R59 R60: library part RES_0R_5p_1206, "Resistor 1206 5% 0,25W", Current=2A/4A, MANUFACTURER="ROYAL OHM", Manufacturer Part Number=1206S4J0000T5E, Supplier Part Number=SMD1206-0R, Supplier Part Number 1=9336974, Temperature="-55 to + 125 stC", Tolerance=5%, Voltage=200, Category=RES, Eng.="W.Bledzinski 03.06.2014", Price1k=0.24, Price10=0.3, Supplier=TME, Supplier 1=Farnell, Type=SMD
R2 R3: library part RES_2R2_5p_1210, "Resistor 1210 5% 0,5W", Temperature="-55 to + 125 stC", Tolerance=5%, Voltage=500, Category=RES, Price1k=0.08, Price10=0.14, Supplier=TME, Supplier 1=Farnell, Type=SMD
R4: library part RES_105k_5p_0603, "Resistor 0603 5% 0,1W", Temperature="-55 to + 125 stC", Tolerance=5%, Voltage=50, Category=RES, Price1k=0.003, Price10=0.01, Supplier=TME, Supplier 1=TME, Type=SMD
R5: library part RES_62k_5p_0603, "Resistor 0603 5% 0,1W", MANUFACTURER=YAGEO, Manufacturer Part Number=RC0603JR-0762K, Supplier Part Number=RC0603JR-0762KL, Supplier Part Number 1=2059649, Temperature="-55 to + 125 stC", Tolerance=5%, Voltage=50, Category=RES, Eng.="W.Bledzinski 14.05.2014", Price1k=0.003, Price10=0.01, Supplier=TME, Supplier 1=Farnell, Type=SMD
R6 R22 R23 R37: library part RES_1k_5p_0603, "Resistor 0603 5% 0,1W", MANUFACTURER=YAGEO, Temperature="-55 to + 125 stC", Tolerance=5%, Voltage=50, Category=RES, Eng.="W.Bledzinski 12.06.2015", Price1k=0.003, Price10=0.01, Supplier=TME, Supplier 1=TME, Type=SMD
R7 R14 R40 R43 R44 R45 R46 R56 R57: library part RES_16k_5p_0603, "Resistor 0603 5% 0,1W", MANUFACTURER=YAGEO, Temperature="-55 to + 125 stC", Tolerance=5%, Voltage=50, Category=RES, Price1k=0.003, Price10=0.01, Supplier=TME, Supplier 1=TME, Type=SMD
R8 R9 R10 R11 R38 R41 R42 R47 R49 R52 R54: library part RES_1k_5p_0603, "Resistor 0603 5% 0,1W", MANUFACTURER=YAGEO, Supplier Part Number=SMD0603-1K, Temperature="-55 to + 125 stC", Tolerance=5%, Voltage=50, Category=RES, Eng.="W.Bledzinski 12.06.2015", Price1k=0.003, Price10=0.01, Supplier=TME, Supplier 1=TME, Supplier Part Number 1=SMD0603-1K, Type=SMD
R12 R15 R53: library part RES_510_5p_0603, "Resistor 0603 5% 0,1W", Supplier Part Number=SMD0603-510R, Temperature="-55 to + 125 stC", Tolerance=5%, Voltage=50, Category=RES, Eng.="W.Bledzinski 23.06.2015", Price1k=0.003, Price10=0.01, Supplier=TME, Supplier 1=TME, Supplier Part Number 1=SMD0603-510R, Type=SMD
R13 R24 R27 R29 R30 R31 R32 R33 R35 R39 R48 R50 R51 R55 R58: library part RES_10k_5p_0603, "Resistor 0603 5% 0,1W", Tolerance=5%, Voltage=50, Category=RES, Price1k=0.003, Price10=0.01, Type=SMD
R16 R21 R34 R36: library part RES_100k_5p_0603, "Resistor 0603 5% 0,1W", Temperature="-55 to + 125 stC", Tolerance=5%, Voltage=50, Category=RES, Price1k=0.003, Price10=0.01, Supplier=TME, Supplier 1=TME, Type=SMD
  R21: Eng.="W.Bledzinski 12.03.2016"
R17: library part RES_47k_5p_0603, "Resistor 0603 5% 0,1W", MANUFACTURER=YAGEO, Supplier Part Number=SMD0603-47K, Temperature="-55 to + 125 stC", Tolerance=5%, Voltage=50, Category=RES, Eng.="W.Bledzinski 12.06.2015", Price1k=0.003, Price10=0.01, Supplier=TME, Supplier 1=TME, Supplier Part Number 1=SMD0603-47K, Type=SMD
R18: library part RES_20k_5p_0603, "Resistor 0603 5% 0,1W", MANUFACTURER="ROYAL OHM", Manufacturer Part Number=0603SAJ0203T5E, Supplier Part Number=SMD0603-20K, Supplier Part Number 1=1799402, Temperature="-55 to + 125 stC", Tolerance=5%, Voltage=50, Category=RES, Eng.="W.Bledzinski 30.04.2014", Price1k=0.003, Price10=0.01, Supplier=TME, Supplier 1=Farnell, Type=SMD
R19 R20: library part RES_22k_5p_0603, "Resistor 0603 5% 0,1W", MANUFACTURER=YAGEO, Supplier Part Number=SMD0603-22K, Temperature="-55 to + 125 stC", Tolerance=5%, Voltage=50, Category=RES, Eng.="W.Bledzinski 12.06.2015", Price1k=0.003, Price10=0.01, Supplier=TME, Supplier 1=TME, Supplier Part Number 1=SMD0603-22K, Type=SMD
R25 R26: library part RES_4M7_5p_1206, "Resistor 1206 5% 0,25W", MANUFACTURER="ROYAL OHM", Manufacturer Part Number=1206S4J0475T5E, Supplier Part Number=SMD1206-4M7, Temperature="-55 to + 125 stC", Tolerance=5%, Voltage=200, Category=RES, Eng.="W.Bledzinski 11.02.2014", Price1k=0.004, Price10=0.009, Supplier=TME, Type=SMD
R28: library part RES_330R_5p_0603, "Resistor 0603 5% 0,1W", Supplier Part Number=SMD0603-330R, Temperature="-55 to + 125 stC", Tolerance=5%, Voltage=50, Category=RES, Eng.="W.Bledzinski 10.12.2015", Price1k=0.003, Price10=0.01, Supplier=TME, Supplier 1=TME, Supplier Part Number 1=SMD0603-330R, Type=SMD
RT1 RT2 RT3: library part REST_10k_5p_0805, "TERMISTOR, NTC, 0805 3900K, permissive current 0.4mA", MANUFACTURER=MURATA, Manufacturer Part Number=NCP21XV103J03RA, Supplier Part Number 1=2456126, Temperature="-40 to + 125 stC", Tolerance=5%, Category=RES, Eng.="W.Bledzinski 01.04.2015", Price1k=0.074, Price10=0.21, Supplier=TME, Supplier 1=Farnell, Supplier Part Number=NCP21XV103J03RA, Type=SMD
RV1: library part RESV_38V_1kA_THT, "warystor S14 30VAC 38VDC 1kA 9J@2ms", MANUFACTURER=EPCOS, Supplier Part Number=SIOV-S14K60, Supplier Part Number 1=SIOV-S14K30, Temperature="-55 to + 125 stC", Tolerance=10%, Category=VAR, Eng.="W.Bledzinski 18.05.2015", Price1k=0.38, Price10=0.83, Supplier=TME, Supplier 1=TME, Type=THT
T1 T2 T3 T4 T6 T7: library part T_IPD034N06N3, "60V N-Mosfet 100A 60V 3.54mohm", Current - Continuous Drain (Id) @ 25°C="100A (Tc)", Drain-source voltage=60V, Drive Voltage (Max Rds On,  Min Rds On)=10V, MANUFACTURER=INFINEON, Operating Temperature="-55°C ~ 175°C (TJ)", Category=TRANSISTOR, Manufacturer Part Number=IPD034N06N3GATMA1, Pricing="1=1.2696, 3=1.0935, 10=0.8782, 100=0.7623, 1000=0.7097 (USD)", Rds On (Max) @ Id, Vgs="3.4 mOhm @ 100A, 10V", Supplier=TME, Supplier 1=TME, Supplier 2=Farnell, Supplier Part Number=IPD034N06N3GATMA1, Supplier Part Number 1=IPD034N06N3GATMA1, Supplier Part Number 2=2443392RL, Type=SMD, Vgs (Max)=±20V, Vgs(th) (Max) @ Id="4V @ 93µA"
T5 T8 T9 T10: library part T_BSS138, "50V 0.3A N mosfet Rdson 6ohm @UGS=4.5V Qg=2.5nC", Current=0.3A, MANUFACTURER=FAIRCHILD, Manufacturer Part Number=BSS138, Supplier Part Number 1=2323154, Temperature="-55 to + 150 stC", Voltage=50V, Category=TRANSISTOR, Eng.="W.Bledzinski 25.04.2014", Price1k=0.04, Price10=0.22, Supplier=TME, Supplier 1=Farnell, Supplier Part Number=BSS138, Type=SMD
T11: library part T_HCPL817-300E, "HCPL817-300E / '0' ctr 50-600% / if 20ma ic 30ma vce 70V vr 4v", Coll-emtr Bkdn Voltage-Min=70V, Dark Current-Max=100nA, Forward Current-Max=50mA, Forward Voltage-Max=1.4V, Isolation Voltage-Max=5kV, Manufacturer Part Number=HCPL-817-36BE, On-State Current-Max=30mA, Supplier Part Number 1=1244566, Supplier 1=Farnell, Type=SMD
U1: library part IC_TPS57160QDGQRQ1, "116uA quescient current", Current - Output=1.5A, Frequency - Switching="100kHz ~ 2.5MHz", MANUFACTURER="Texas Instruments", Operating Temperature="-40°C ~ 125°C (TA)", Supplier Part Number 1=2492454, Voltage - Input (Max)=60V, Manufacturer Part Number=TPS57160QDGQRQ1, Pricing="1=3.02, 10=2.716, 100=2.225, 500=1.89414, 1000=1.59747 (GBP)", Supplier 1=Farnell, Supplier 2=Avnet, Supplier Part Number 2=TPS57160QDGQRQ1
U2: library part IC_LMV772QMM, "LowOffset,LowNoise,RROOperationalAmplifier", MANUFACTURER="TI National Semiconductor", Max Operating Temperature=125°C, Max Supply Voltage=5.5V, Min Operating Temperature=-40°C, Min Supply Voltage=2.7V, Operating Supply Current=600uA, Supplier Part Number 1=926-LMV772QMM/NOPB, Gain Bandwidth Product=3.5MHz, Manufacturer Part Number=LMV772QMM/NOPB, Supplier 1=Mouser, Supplier Unit Price 1=$2.66
U3: library part MOD_WT8266-S2, Current=215mA, MANUFACTURER=xiaoe, Supplier Part Number=WIFI-WT8266-S2, Temperature="-40 to +85 stC", Voltage="3.0 - 3.6", Category=MODULE, Eng.="W.Bledzinski 29.09.2016", Manufacturer Part Number=WT8266-S2, Price1k=6, Price10=8, Supplier=maritex, Supplier 1=TME, Supplier Part Number 1=WT8266-S2, Type=SMD
U4: library part IC_MCP1825S-3.3_SOT223, "LDO=210mV 6V DC max, Iq 120uA, Cout 1u ceramic", Current=500mA, MANUFACTURER=Microchip, Manufacturer Part Number=MCP1825S-3302E/DB, Voltage=6V, Category=IC, Price1k=0.75, Price10=1, Supplier=TME, Supplier 1=Farnell, Supplier Part Number=MCP1825S-3302ED, Type=SMD
U5: "LQFP64, 10x10mm", Case/Package=LQFP, MANUFACTURER=STMicroelectronics, Manufacturer Part Number=STM32L431RCT6, Supplier 1=Arrow, Supplier 2=TME, Supplier Part Number 1=STM32L431RCT6, Supplier Part Number 2=STM32L431RCT6, Supplier Unit Price 1=$3.52
X1: "SMD 5,0x3,2mm xtal drive 100uW max; ESR 150 ohm", ESR (Equivalent Series Resistance)=500R, Frequency=8MHz, Frequency Stability=30ppm, Frequency Tolerance=20ppm, MANUFACTURER=Abracon, Manufacturer Part Number=ABM3-8.000MHZ-D2Y-T, Max Operating Temperature=85°C, Min Operating Temperature=-40°C, Category=OSC, Composition=Ceramic, Depth=3.2mm, Supplier Unit Price 1=$0.52632, Type=SMD, Width=3.2mm

## Free pads (board coordinates)
  round 177.17 hole 118.11 unplated: 0(140,1980) 0(2160,180) 0(2160,3020)

## Via types
v1: diameter 45, hole 20, Top Layer to Bottom Layer, tented both sides, 121 vias
v2: diameter 25.98, hole 12.99, Top Layer to Bottom Layer, tented both sides, 4 vias

## Nets (pads, with @x,y where several pads share a name; then routed paths per layer and width w, separated by ;. In a path a pad name is that pad's centre, name@x,y a point inside that pad or via, vN(x,y) a via of type N, cw(c..) or ccw(c..) an arc to the next point about the centre after c; other vN are vias at no path point)
+3: C24.1 C25.1 C30.1 C31.1 C39.1 C40.1 C41.1 C42.1 J5.4 L3.1 R24.2 R27.1 R29.1 R30.1 R31.1 R32.1 R43.1 R44.1 R45.1 R46.1 R48.1 R50.1 R53.2 R55.1 U3.1 U4.3 U5.1 U5.13 U5.19 U5.32 U5.48 U5.64 | length 10152.2
  Top Layer w8: v1(280,1480) 320,1440 380,1440 v1(580,1240) 620,1280 740,1280 ; R53.2@326.93,640 v1(400,640) ; C42.1@913.46,720 955.59,762.13 U5.48@955.59,852.36 ; R46.1@960,1606.54 R44.1@960,1533.46 913.46,1533.46 904,1524 904,1384.88 868.43,1349.31 769.31,1349.31 740,1320 740,1280 ; U5.32@1032.36,1224.41 1032.36,1267.64 1013.46,1286.54 C41.1@960,1286.54 913.46,1240 760,1240 740,1260 740,1280 ; U5.19@1288.27,1224.41 1288.27,1151.73 1351.42,1088.58 U5.13@1404.41,1088.58 1504.17,1088.58 ; R45.1@1480,1526.93 R43.1@1480,1593.07 ; C40.1@1506.54,1140 1504.17,1137.63 1504.17,1088.58 ; 1760,1080 1751.42,1088.58 1504.17,1088.58
  Top Layer w10: v1(220,200) 220,206.54 R48.1@260,246.54 ; v1(700,640) v1(900,640) 900,649.47 913.46,662.94 C42.1@913.46,720 ; R44.1@960,1533.46 1024.82,1533.46 1044.75,1513.53 v1(1104.85,1513.53) ; v1(1220,1500) 1311.2,1500 1311.79,1500.59 1386.81,1500.59 1387.4,1500 1420,1500 1446.93,1526.93 R45.1@1480,1526.93 ; U5.64@1327.64,775.59 1327.64,732.36 1360,700 1360,660 1365.86,654.14 1392.39,654.14 R50.1@1400,646.54 1446.54,600 C30.1@1524,600 ; U5.1@1404.41,852.36 1447.64,852.36 1480,820 C39.1@1480,773.46 1493.46,760 1520,760 1540,740 1620,740 1640,720
  Top Layer w20: v1(940,280) 1000,220 1200,220 1280,300 1280,340 1353.46,413.46 C25.1@1420,413.46 1420,456.73 ; C24.1@1420,500 1420,456.73 ; R45.1@1480,1526.93 R45.1@1490,1516.93 ; v1(1560,1380) 1560,1373.24 1573.46,1359.77 R31.1@1573.46,1300 R30.1@1573.46,1220 R32.1@1653.07,1220 1693.07,1260 1748.28,1260 1760,1248.28 1760,1080 1780,1060 1780,740 1760,720 1640,720 1524,604 C30.1@1524,600 1526.72,597.28 1526.72,456.9 U4.3@1529.45,454.17 1422.56,454.17 1420,456.73 ; R55.1@1600,2593.46 v1(1600,2640) L3.1@1600,2686.54
  Bottom Layer w8: v1(400,640) 440,680 R27.1@486.54,680 486.54,633.46 500,620 586.54,620 R29.1@686.54,720 ; v1(940,280) J5.4@940,360 ; v1(1560,1380) 1560,1776.87 1520,1816.87 1520,1920 1579,1979 1579,2359 1600,2380 v1(1600,2640)
  Bottom Layer w10: v1(580,1240) 580,1189.19 600,1169.19 600,1127.86 592.5,1120.36 592.5,947.5 686.54,853.46 R29.1@686.54,720 686.54,662.94 700,649.47 v1(700,640) ; v1(900,640) 1000,540 1000,486.87 940,426.87 J5.4@940,360 ; v1(1104.85,1513.53) 1114.33,1513.53 1127.85,1500 v1(1220,1500)
  Bottom Layer w15: v1(220,200) 261.5,241.5 901.5,241.5 v1(940,280)
  Bottom Layer w20: v1(280,1480) R24.2@346.54,1480 ; U3.1@316.02,1375.28 316.02,1449.49 R24.2@346.54,1480 ; C31.1@486.54,1480 486.54,1528.28 474.82,1540 361.72,1540 350,1528.28 350,1483.46 R24.2@346.54,1480